# Altium PCB CareLite 1.21.pcbdoc (part 1 of 3)
Units mil, origin at the board's own origin, x right, y up, seen from the top; angles counter-clockwise.
Board outline 3463.4 x 4229.5 mil, 2 copper layers (Top Layer, Bottom Layer); 41 components, 60 nets, 161 pads, 146 vias.
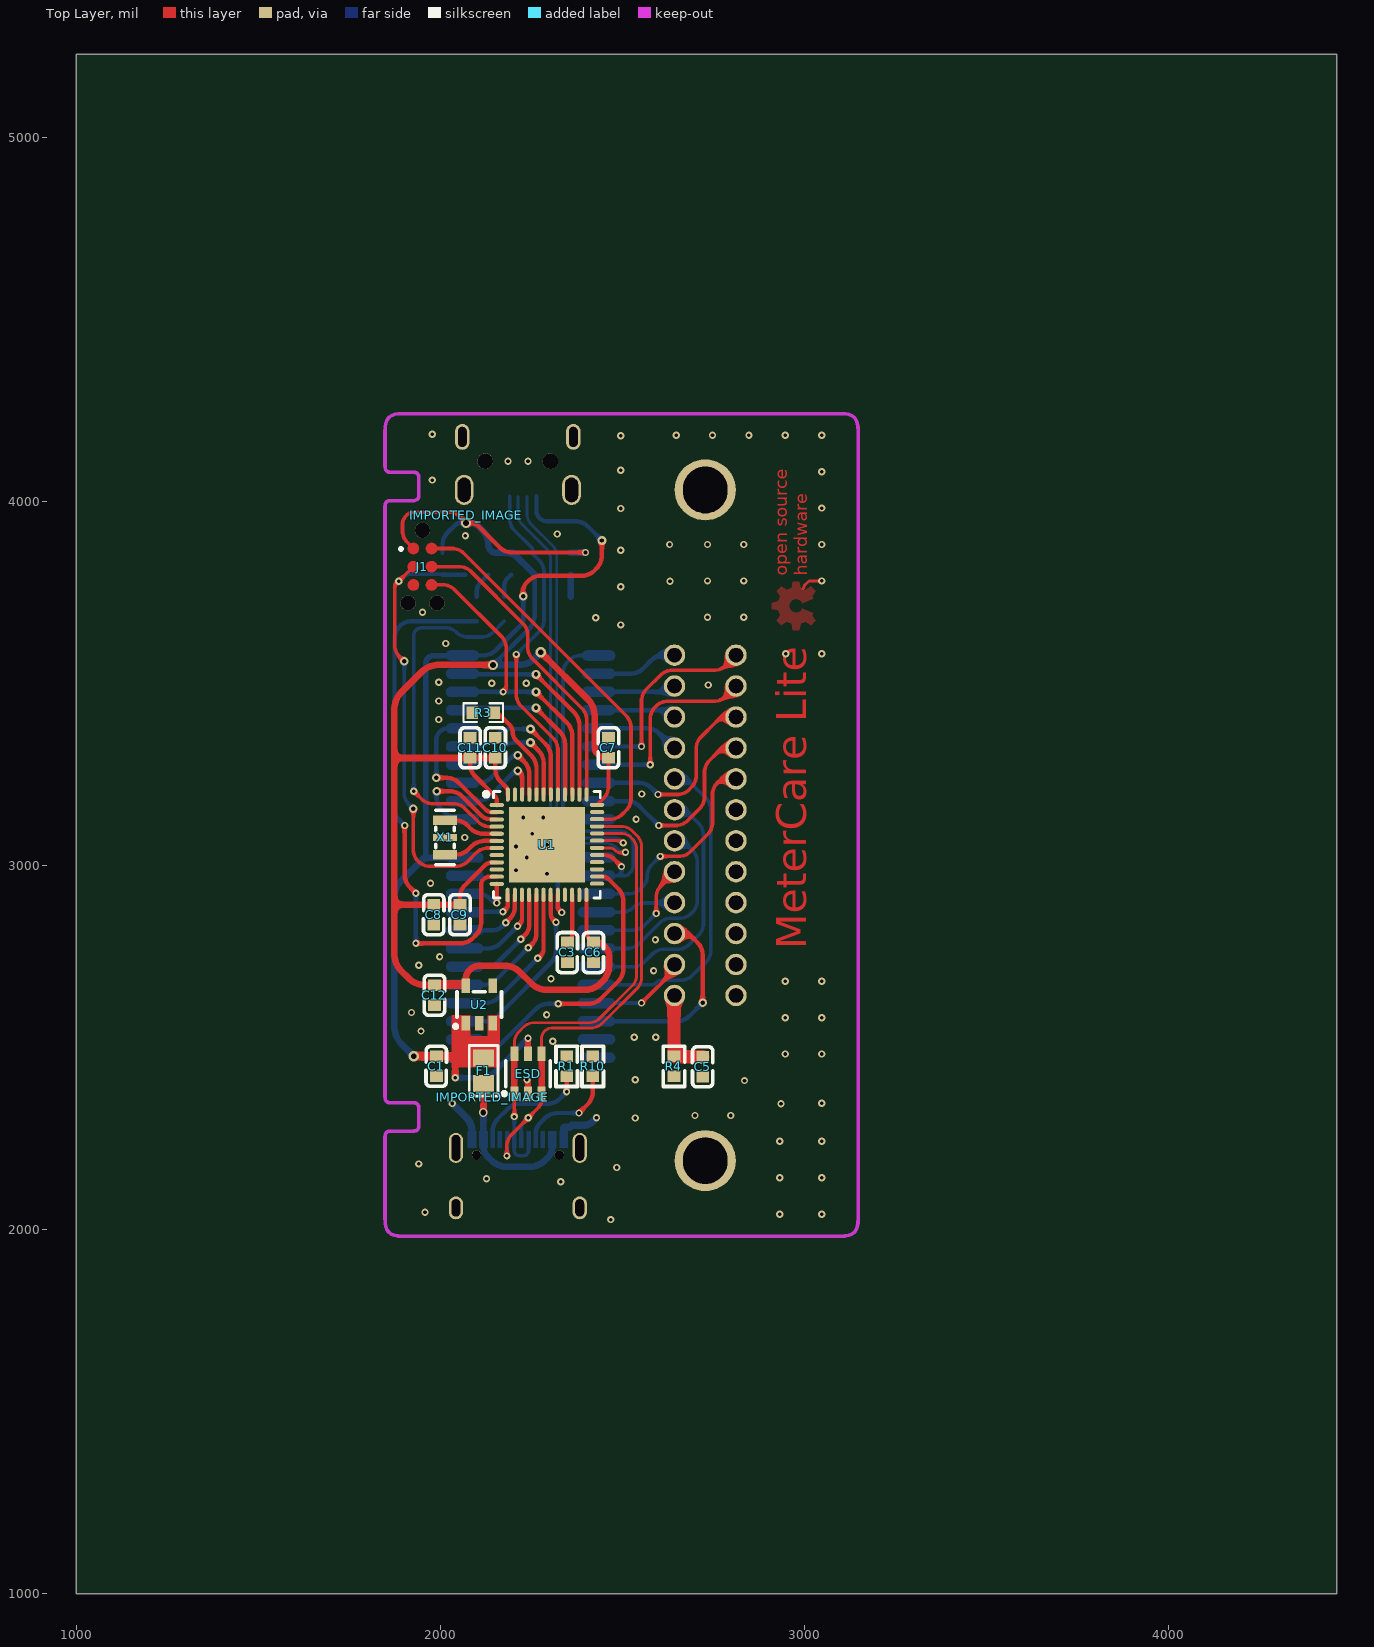
[diagram p0: Top Layer view]
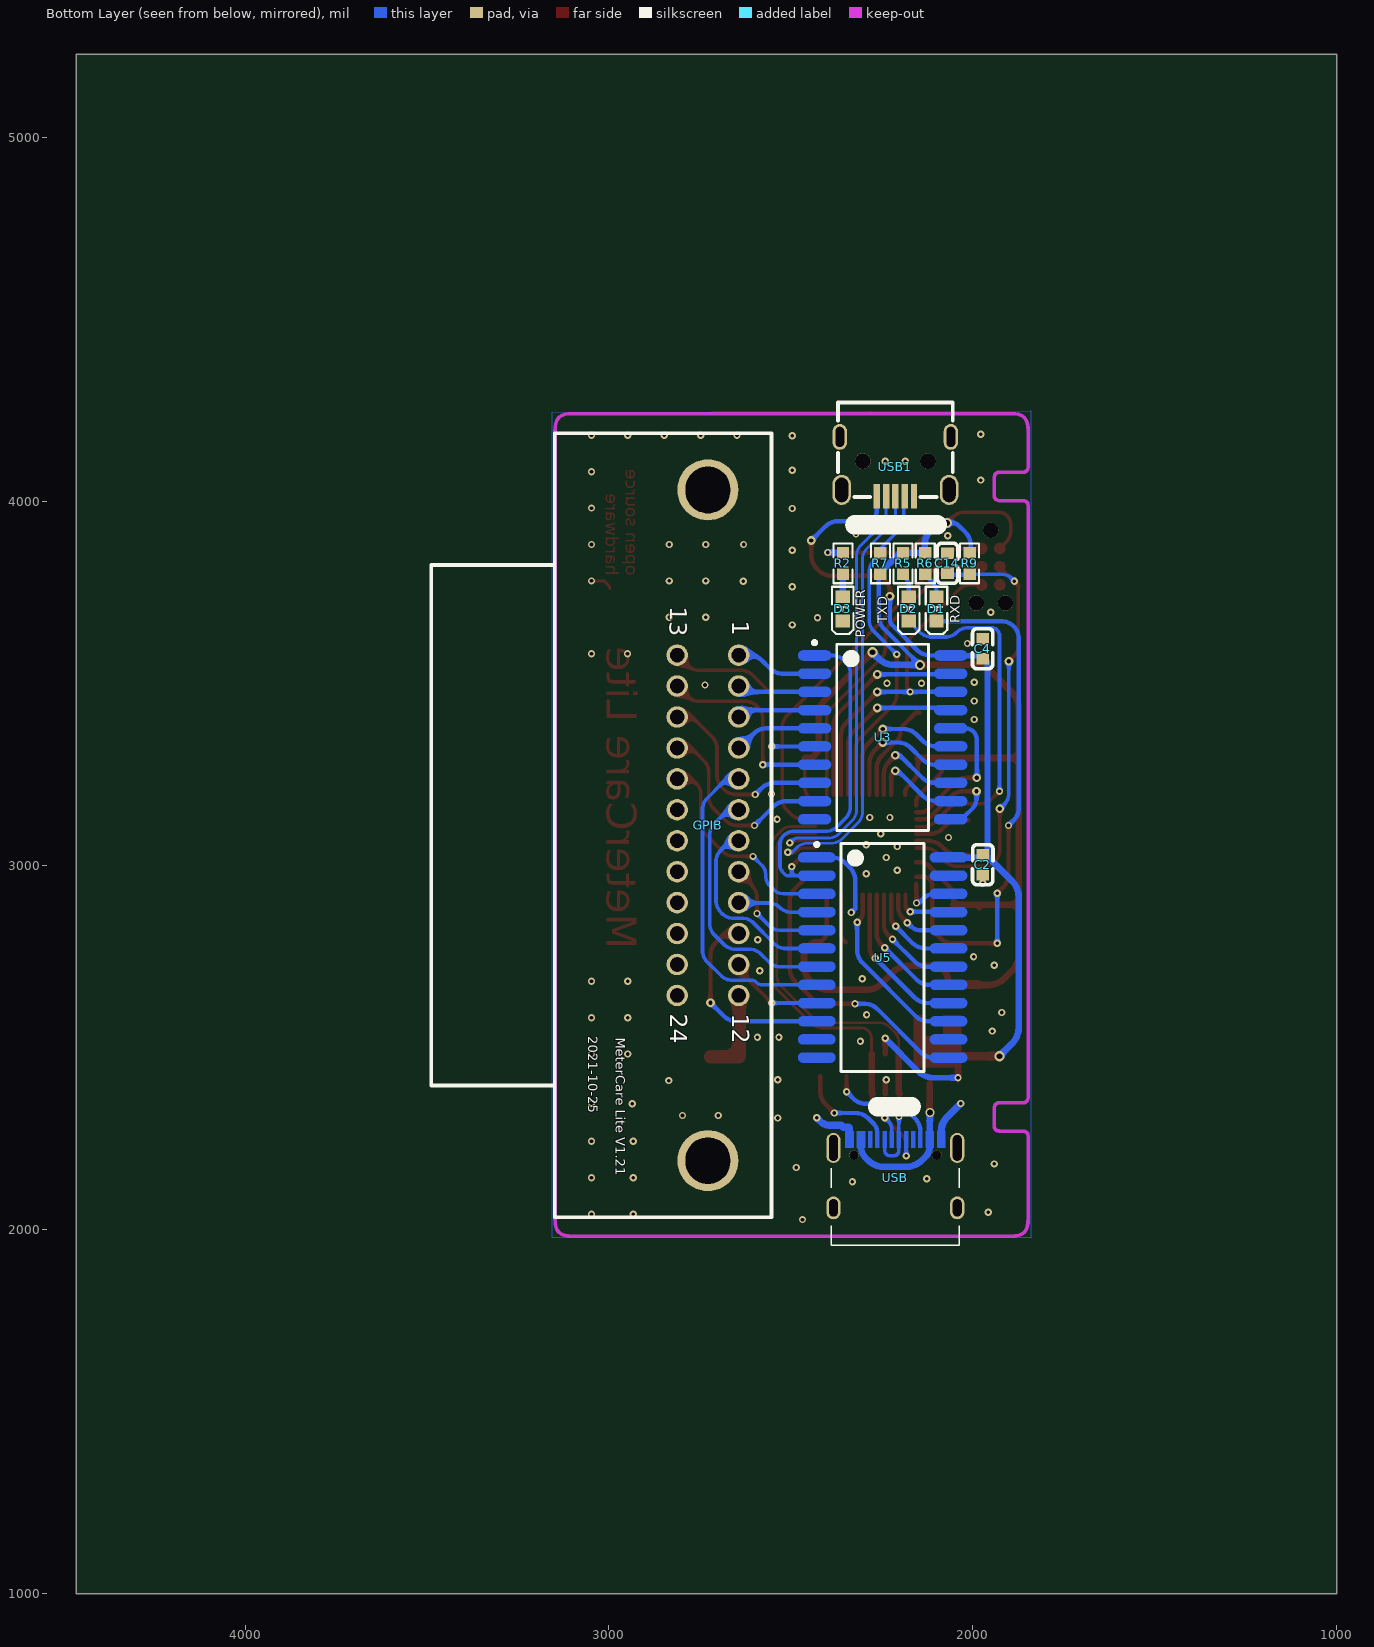
[diagram p1: Bottom Layer view, seen from below]

## Layer stack, top to bottom
Top Layer: signal copper (thickness not stored)
Dielectric: dielectric 12.6, FR-4, Dk 4.8
Bottom Layer: signal copper (thickness not stored)

## Board outline
4463.4,1000 1000,1000 1000,5229.5 4463.4,5229.5

## Components (designator, comment, footprint, x,y, rotation, side; value= is the part's Value field where it differs from the comment)
C1 "10uF" C0603#1 1989.02,2449.15 r90 top
C2 "100nF" C0603#2 1973.02,3002.75 r90 bottom
C3 "4.7uF" C0603#1 2349.02,2761.75 r90 top
C4 "100nF" C0603#2 1973.02,3596.75 r270 bottom
C5 "1nF" C0603#1 2721.02,2447.75 r90 top
C6 "100nF" C0603#1 2420.62,2761.75 r90 top
C7 "100nF" C0603#1 2462.02,3323.75 r270 top
C8 "100nF" C0603#1 1982.02,2865.75 r90 top
C9 "100nF" C0603#1 2054.02,2865.75 r90 top
C10 "100nF" C0603#1 2151.02,3323.75 r270 top
C11 "100nF" C0603#1 2082.02,3323.75 r270 top
C12 "10uF" C0603#1 1984.02,2644.75 r90 top
C14 "100n" C0603#2 2070.02,3830.75 r90 bottom
D1 "LED" LED0603-FD 2100.02,3705.75 r90 bottom
D2 "LED" LED0603-FD 2176.02,3705.75 r90 bottom
D3 "LED" LED0603-FD 2358.02,3705.75 r90 bottom
ESD "SRV05-4-P-T7" SOT-23-6_L2.9-W1.6-P0.95-LS2.8-BL 2241.02,2428.75 r0 top
F1 "0.5A/6V" 0805_L_JX 2119.02,2436.75 r90 top
GPIB "112-024-113R001" "IEEE-488 SOCKET, 24PIN, RIGHT ANGLE, MALE, 112-024-113R001, FUY57109" 3018.02,3102.75 r180 bottom
IMPORTED_IMAGE "IMPORTED_IMAGE" IMPORTED_IMAGE 2071.89,3963.18 r0 top
IMPORTED_IMAGE "IMPORTED_IMAGE" IMPORTED_IMAGE 2143.64,2364.6 r0 top
J1 "8.06.16" 80616-S 1951.02,3921.75 r270 top
R1 "5.1K" R0603#1 2347.45,2448.75 r90 top
R2 "470R" R0603#2 2357.02,3830.75 r90 bottom
R3 "10K" R0603#3 2118.02,3420.75 r180 top
R4 "1M" R0603#1 2642.02,2448.75 r270 top
R5 "470R" R0603#2 2192.02,3830.75 r90 bottom
R6 "470R" R0603#2 2131.02,3830.75 r90 bottom
R7 "4.7K" R0603#2 2254.02,3830.75 r270 bottom
R9 "10K" R0603#2 2009.02,3830.75 r270 bottom
R10 "5.1K" R0603#1 2419.02,2448.75 r90 top
U1 "STM32F411CEU6TR" QFN-48_L7.0-W7.0-P0.50-BL-EP5.1 2293.02,3057.75 r270 top
U2 "LP5907QMFX-3.3Q1" SOT-23-5_L3.0-W1.7-P0.95-LS2.8-BR 2107.03,2618.74 r270 top
U3 "SN75160" SOIC127P1030-20AM 2248.02,3352.75 r0 bottom
U5 "SN75162" SOIC127P1030-24AM 2248.02,2747.75 r0 bottom
USB "USB_C" USB_C_CUSB31-CFM2AX-01-Y 2213.02,2107.75 r0 bottom
USB1 "U-D-M7DS-G-2" MIRCO-USB-SMD_U-D-M7DS-G-2 2213.02,4096.75 r180 bottom
X1 "8MHz" OSC-SMD_3P-L3.2-W1.3-P1.2-L 2013.02,3077.75 r90 top
? "" ? 1722.51,3112.75 r0 top
? "" ? 2498.02,1879.17 r0 top
? "" ? 3529.71,3112.75 r0 top

## Footprints (in the part's own frame and the unit in brackets; to place one, negate y for a bottom-side part, rotate by r counter-clockwise, add the part's x,y. Pads: shape width x height; smd on the part's side, far side on the other; paste and mask are expansions set on the pad)
0805_L_JX [mil]
  rect 45.67x57.87 smd paste+0 mask+4: 1(-35,0) 2(35,0)
  silkscreen extent -69,-39 69,39
80616-S [mil]
  round 42 hole 42 unplated paste+0: ""(0,0) ""(200,-40) ""(200,40)
  Top Layer region: 34.51,-25 34.62,-23.13 34.96,-21.29 35.51,-19.51 36.28,-17.8 37.25,-16.2 38.4,-14.73 39.73,-13.4 41.2,-12.25 42.8,-11.28 44.51,-10.51 46.29,-9.96 48.13,-9.62 50,-9.51 50,-9.51 51.87,-9.62 53.71,-9.96 55.49,-10.51 57.2,-11.28 58.8,-12.25 60.27,-13.4 61.6,-14.73 62.75,-16.2 63.72,-17.8 64.49,-19.51 65.04,-21.29 65.38,-23.13 65.49,-25 65.49,-25 65.38,-26.87 65.04,-28.71 64.49,-30.49 63.72,-32.2 62.75,-33.8 61.6,-35.27 60.27,-36.6 58.8,-37.75 57.2,-38.72 55.49,-39.49 53.71,-40.04 51.87,-40.38 50,-40.49 50,-40.49 48.13,-40.38 46.29,-40.04 44.51,-39.49 42.8,-38.72 41.2,-37.75 39.73,-36.6 38.4,-35.27 37.25,-33.8 36.28,-32.2 35.51,-30.49 34.96,-28.71 34.62,-26.87
  Top Layer region: 34.51,25 34.62,26.87 34.96,28.71 35.51,30.49 36.28,32.2 37.25,33.8 38.4,35.27 39.73,36.6 41.2,37.75 42.8,38.72 44.51,39.49 46.29,40.04 48.13,40.38 50,40.49 50,40.49 51.87,40.38 53.71,40.04 55.49,39.49 57.2,38.72 58.8,37.75 60.27,36.6 61.6,35.27 62.75,33.8 63.72,32.2 64.49,30.49 65.04,28.71 65.38,26.87 65.49,25 65.49,25 65.38,23.13 65.04,21.29 64.49,19.51 63.72,17.8 62.75,16.2 61.6,14.73 60.27,13.4 58.8,12.25 57.2,11.28 55.49,10.51 53.71,9.96 51.87,9.62 50,9.51 50,9.51 48.13,9.62 46.29,9.96 44.51,10.51 42.8,11.28 41.2,12.25 39.73,13.4 38.4,14.73 37.25,16.2 36.28,17.8 35.51,19.51 34.96,21.29 34.62,23.13
  Top Layer region: 84.51,-25 84.62,-23.13 84.96,-21.29 85.51,-19.51 86.28,-17.8 87.25,-16.2 88.4,-14.73 89.73,-13.4 91.2,-12.25 92.8,-11.28 94.51,-10.51 96.29,-9.96 98.13,-9.62 100,-9.51 100,-9.51 101.87,-9.62 103.71,-9.96 105.49,-10.51 107.2,-11.28 108.8,-12.25 110.27,-13.4 111.6,-14.73 112.75,-16.2 113.72,-17.8 114.49,-19.51 115.04,-21.29 115.38,-23.13 115.49,-25 115.49,-25 115.38,-26.87 115.04,-28.71 114.49,-30.49 113.72,-32.2 112.75,-33.8 111.6,-35.27 110.27,-36.6 108.8,-37.75 107.2,-38.72 105.49,-39.49 103.71,-40.04 101.87,-40.38 100,-40.49 100,-40.49 98.13,-40.38 96.29,-40.04 94.51,-39.49 92.8,-38.72 91.2,-37.75 89.73,-36.6 88.4,-35.27 87.25,-33.8 86.28,-32.2 85.51,-30.49 84.96,-28.71 84.62,-26.87
  Top Layer region: 84.51,25 84.62,26.87 84.96,28.71 85.51,30.49 86.28,32.2 87.25,33.8 88.4,35.27 89.73,36.6 91.2,37.75 92.8,38.72 94.51,39.49 96.29,40.04 98.13,40.38 100,40.49 100,40.49 101.87,40.38 103.71,40.04 105.49,39.49 107.2,38.72 108.8,37.75 110.27,36.6 111.6,35.27 112.75,33.8 113.72,32.2 114.49,30.49 115.04,28.71 115.38,26.87 115.49,25 115.49,25 115.38,23.13 115.04,21.29 114.49,19.51 113.72,17.8 112.75,16.2 111.6,14.73 110.27,13.4 108.8,12.25 107.2,11.28 105.49,10.51 103.71,9.96 101.87,9.62 100,9.51 100,9.51 98.13,9.62 96.29,9.96 94.51,10.51 92.8,11.28 91.2,12.25 89.73,13.4 88.4,14.73 87.25,16.2 86.28,17.8 85.51,19.51 84.96,21.29 84.62,23.13
  Top Layer region: 134.51,-25 134.62,-23.13 134.96,-21.29 135.51,-19.51 136.28,-17.8 137.25,-16.2 138.4,-14.73 139.73,-13.4 141.2,-12.25 142.8,-11.28 144.51,-10.51 146.29,-9.96 148.13,-9.62 150,-9.51 150,-9.51 151.87,-9.62 153.71,-9.96 155.49,-10.51 157.2,-11.28 158.8,-12.25 160.27,-13.4 161.6,-14.73 162.75,-16.2 163.72,-17.8 164.49,-19.51 165.04,-21.29 165.38,-23.13 165.49,-25 165.49,-25 165.38,-26.87 165.04,-28.71 164.49,-30.49 163.72,-32.2 162.75,-33.8 161.6,-35.27 160.27,-36.6 158.8,-37.75 157.2,-38.72 155.49,-39.49 153.71,-40.04 151.87,-40.38 150,-40.49 150,-40.49 148.13,-40.38 146.29,-40.04 144.51,-39.49 142.8,-38.72 141.2,-37.75 139.73,-36.6 138.4,-35.27 137.25,-33.8 136.28,-32.2 135.51,-30.49 134.96,-28.71 134.62,-26.87
  Top Layer region: 134.51,25 134.62,26.87 134.96,28.71 135.51,30.49 136.28,32.2 137.25,33.8 138.4,35.27 139.73,36.6 141.2,37.75 142.8,38.72 144.51,39.49 146.29,40.04 148.13,40.38 150,40.49 150,40.49 151.87,40.38 153.71,40.04 155.49,39.49 157.2,38.72 158.8,37.75 160.27,36.6 161.6,35.27 162.75,33.8 163.72,32.2 164.49,30.49 165.04,28.71 165.38,26.87 165.49,25 165.49,25 165.38,23.13 165.04,21.29 164.49,19.51 163.72,17.8 162.75,16.2 161.6,14.73 160.27,13.4 158.8,12.25 157.2,11.28 155.49,10.51 153.71,9.96 151.87,9.62 150,9.51 150,9.51 148.13,9.62 146.29,9.96 144.51,10.51 142.8,11.28 141.2,12.25 139.73,13.4 138.4,14.73 137.25,16.2 136.28,17.8 135.51,19.51 134.96,21.29 134.62,23.13
  silkscreen extent 47,-63 55,-55
C0603#1 [mm]
  rect 0.8x0.9 smd paste+0 mask+0.051: 1(-0.7,0) 2(0.7,0)
  silkscreen extent -1.41,-0.71 1.39,0.72
C0603#2 [mm]
  rect 0.8x0.9 smd paste+0 mask+0.051: 1(0.7,0) 2(-0.7,0)
  silkscreen extent -1.39,-0.72 1.41,0.71
"IEEE-488 SOCKET, 24PIN, RIGHT ANGLE, MALE, 112-024-113R001, FUY57109" [mil]
  round 59 hole 39 slot 39.2 at 90 deg paste+0 mask+4: 1(374.5,476) 2(374.5,391) 3(374.5,306) 4(374.5,221) 5(374.5,136) 6(374.5,51) 7(374.5,-34) 8(374.5,-119) 9(374.5,-204) 10(374.5,-289) 11(374.5,-374) 12(374.5,-459) 13(205.5,476) 14(205.5,391) 15(205.5,306) 16(205.5,221) 17(205.5,136) 18(205.5,51) 19(205.5,-34) 20(205.5,-119) 21(205.5,-204) 22(205.5,-289) 23(205.5,-374) 24(205.5,-459)
  round 168 hole 122.05 slot 128.15 at 90 deg paste+0 mask+4: GUIDE@L(290,930) GUIDE@R(290,-913)
  silkscreen extent -470,-1068 464,1085
IMPORTED_IMAGE [mil]
LED0603-FD [mm]
  rect 0.9x1 smd paste+0 mask+0.051: 1(0.85,0) 2(-0.85,0)
  silkscreen extent -1.75,-0.75 1.55,0.75
MIRCO-USB-SMD_U-D-M7DS-G-2 [mm]
  rect 0.45x1.7 smd paste-100 mask+0.05: 1(-1.3,-2.075) 2(-0.65,-2.075) 3(0,-2.075) 4(0.65,-2.075) 5(1.3,-2.075)
  oval 1.3x2.1 hole 0.9 slot 1.7 at 90 deg paste+0 mask+0.05: 6(3.75,-1.625) 9(-3.75,-1.625)
  oval 1x1.8 hole 0.6 slot 1.4 at 90 deg paste+0 mask+0.05: 7(3.875,2.075) 8(-3.875,2.075)
  round 1.1 hole 1.1 unplated paste+0: ""(-2.275,0.375) ""(2.275,0.375)
  silkscreen extent -4,-2.13 4,4.47
OSC-SMD_3P-L3.2-W1.3-P1.2-L [mm]
  rect 0.65x1.7 smd paste+0 mask+0.051: 1(-1.2,0) 3(1.2,0)
  rect 0.5x1.7 smd paste+0 mask+0.051: 2(0,0)
  silkscreen extent -1.9,-0.65 1.9,0.65
QFN-48_L7.0-W7.0-P0.50-BL-EP5.1 [mm]
  oval 0.28x1 smd paste+0 mask+0.102: 1(-2.769,-3.5) 2(-2.268,-3.5) 3(-1.768,-3.5) 4(-1.268,-3.5) 5(-0.767,-3.5) 6(-0.267,-3.5) 7(0.231,-3.5) 8(0.731,-3.5) 9(1.232,-3.5) 10(1.732,-3.5) 11(2.233,-3.5) 12(2.733,-3.5) 25(2.718,3.5) 26(2.217,3.5) 27(1.717,3.5) 28(1.217,3.5) 29(0.716,3.5) 30(0.216,3.5) 31(-0.282,3.5) 32(-0.782,3.5) 33(-1.283,3.5) 34(-1.783,3.5) 35(-2.284,3.5) 36(-2.784,3.5)
  oval 1x0.28 smd paste+0 mask+0.102: 13(3.5,-2.743) 14(3.5,-2.243) 15(3.5,-1.742) 16(3.5,-1.242) 17(3.5,-0.742) 18(3.5,-0.241) 19(3.5,0.257) 20(3.5,0.757) 21(3.5,1.257) 22(3.5,1.758) 23(3.5,2.258) 24(3.5,2.759) 37(-3.5,2.769) 38(-3.5,2.268) 39(-3.5,1.768) 40(-3.5,1.268) 41(-3.5,0.767) 42(-3.5,0.267) 43(-3.5,-0.231) 44(-3.5,-0.731) 45(-3.5,-1.232) 46(-3.5,-1.732) 47(-3.5,-2.233) 48(-3.5,-2.733)
  rect 5.3x5.3 smd paste+0 mask+0.102: 49(0,0)
  silkscreen extent -3.73,-4.4 3.72,3.73
R0603#1 [mm]
  rect 0.8x0.9 smd paste+0 mask+0.102: 1(-0.7,0) 2(0.7,0)
  silkscreen extent -1.4,-0.75 1.4,0.76
R0603#2 [mm]
  rect 0.806x0.864 smd paste-100 mask+0.051: 1(0.753,0) 2(-0.753,0)
  silkscreen extent -1.39,-0.66 1.39,0.66
R0603#3 [mm]
  rect 0.806x0.864 smd paste-100 mask+0.051: 1(-0.753,0) 2(0.753,0)
  silkscreen extent -1.39,-0.66 1.39,0.66
SOIC127P1030-20AM [mil]
  Top Layer region: 155.51,-238.78 154.53,-238.74 153.55,-238.64 152.58,-238.46 151.63,-238.22 150.7,-237.91 149.79,-237.53 148.91,-237.09 148.06,-236.59 147.25,-236.03 146.49,-235.41 145.77,-234.74 145.1,-234.02 144.48,-233.26 143.92,-232.45 143.42,-231.6 142.98,-230.72 142.6,-229.82 142.29,-228.88 142.05,-227.93 141.87,-226.96 141.77,-225.98 141.73,-225 141.77,-224.02 141.87,-223.04 142.05,-222.07 142.29,-221.12 142.6,-220.18 142.98,-219.28 143.42,-218.4 143.92,-217.55 144.48,-216.74 145.1,-215.98 145.77,-215.26 146.49,-214.59 147.25,-213.97 148.06,-213.41 148.91,-212.91 149.79,-212.47 150.7,-212.09 151.63,-211.78 152.58,-211.53 153.55,-211.36 154.53,-211.26 155.51,-211.22 218.5,-211.22 219.49,-211.26 220.47,-211.36 221.43,-211.53 222.39,-211.78 223.32,-212.09 224.23,-212.47 225.11,-212.91 225.95,-213.41 226.76,-213.97 227.53,-214.59 228.25,-215.26 228.92,-215.98 229.53,-216.74 230.1,-217.55 230.6,-218.4 231.04,-219.28 231.41,-220.18 231.72,-221.12 231.97,-222.07 232.14,-223.04 232.25,-224.02 232.28,-225 232.25,-225.98 232.14,-226.96 231.97,-227.93 231.72,-228.88 231.41,-229.82 231.04,-230.72 230.6,-231.6 230.1,-232.45 229.53,-233.26 228.92,-234.02 228.25,-234.74 227.53,-235.41 226.76,-236.03 225.95,-236.59 225.11,-237.09 224.23,-237.53 223.32,-237.91 222.39,-238.22 221.43,-238.46 220.47,-238.64 219.49,-238.74 218.5,-238.78
  Top Layer region: 155.51,-188.78 154.53,-188.74 153.55,-188.64 152.58,-188.46 151.63,-188.22 150.7,-187.91 149.79,-187.53 148.91,-187.09 148.06,-186.59 147.25,-186.03 146.49,-185.41 145.77,-184.74 145.1,-184.02 144.48,-183.26 143.92,-182.45 143.42,-181.6 142.98,-180.72 142.6,-179.82 142.29,-178.88 142.05,-177.93 141.87,-176.96 141.77,-175.98 141.73,-175 141.77,-174.02 141.87,-173.04 142.05,-172.07 142.29,-171.12 142.6,-170.18 142.98,-169.28 143.42,-168.4 143.92,-167.55 144.48,-166.74 145.1,-165.98 145.77,-165.26 146.49,-164.59 147.25,-163.97 148.06,-163.41 148.91,-162.91 149.79,-162.47 150.7,-162.09 151.63,-161.78 152.58,-161.53 153.55,-161.36 154.53,-161.26 155.51,-161.22 218.5,-161.22 219.49,-161.26 220.47,-161.36 221.43,-161.53 222.39,-161.78 223.32,-162.09 224.23,-162.47 225.11,-162.91 225.95,-163.41 226.76,-163.97 227.53,-164.59 228.25,-165.26 228.92,-165.98 229.53,-166.74 230.1,-167.55 230.6,-168.4 231.04,-169.28 231.41,-170.18 231.72,-171.12 231.97,-172.07 232.14,-173.04 232.25,-174.02 232.28,-175 232.25,-175.98 232.14,-176.96 231.97,-177.93 231.72,-178.88 231.41,-179.82 231.04,-180.72 230.6,-181.6 230.1,-182.45 229.53,-183.26 228.92,-184.02 228.25,-184.74 227.53,-185.41 226.76,-186.03 225.95,-186.59 225.11,-187.09 224.23,-187.53 223.32,-187.91 222.39,-188.22 221.43,-188.46 220.47,-188.64 219.49,-188.74 218.5,-188.78
  Top Layer region: 155.51,-138.78 154.53,-138.74 153.55,-138.64 152.58,-138.46 151.63,-138.22 150.7,-137.91 149.79,-137.53 148.91,-137.09 148.06,-136.59 147.25,-136.03 146.49,-135.41 145.77,-134.74 145.1,-134.02 144.48,-133.26 143.92,-132.45 143.42,-131.6 142.98,-130.72 142.6,-129.82 142.29,-128.88 142.05,-127.93 141.87,-126.96 141.77,-125.98 141.73,-125 141.77,-124.02 141.87,-123.04 142.05,-122.07 142.29,-121.12 142.6,-120.18 142.98,-119.28 143.42,-118.4 143.92,-117.55 144.48,-116.74 145.1,-115.98 145.77,-115.26 146.49,-114.59 147.25,-113.97 148.06,-113.41 148.91,-112.91 149.79,-112.47 150.7,-112.09 151.63,-111.78 152.58,-111.53 153.55,-111.36 154.53,-111.26 155.51,-111.22 218.5,-111.22 219.49,-111.26 220.47,-111.36 221.43,-111.53 222.39,-111.78 223.32,-112.09 224.23,-112.47 225.11,-112.91 225.95,-113.41 226.76,-113.97 227.53,-114.59 228.25,-115.26 228.92,-115.98 229.53,-116.74 230.1,-117.55 230.6,-118.4 231.04,-119.28 231.41,-120.18 231.72,-121.12 231.97,-122.07 232.14,-123.04 232.25,-124.02 232.28,-125 232.25,-125.98 232.14,-126.96 231.97,-127.93 231.72,-128.88 231.41,-129.82 231.04,-130.72 230.6,-131.6 230.1,-132.45 229.53,-133.26 228.92,-134.02 228.25,-134.74 227.53,-135.41 226.76,-136.03 225.95,-136.59 225.11,-137.09 224.23,-137.53 223.32,-137.91 222.39,-138.22 221.43,-138.46 220.47,-138.64 219.49,-138.74 218.5,-138.78
  Top Layer region: 155.51,-88.78 154.53,-88.74 153.55,-88.64 152.58,-88.46 151.63,-88.22 150.7,-87.91 149.79,-87.53 148.91,-87.09 148.06,-86.59 147.25,-86.03 146.49,-85.41 145.77,-84.74 145.1,-84.02 144.48,-83.26 143.92,-82.45 143.42,-81.6 142.98,-80.72 142.6,-79.82 142.29,-78.88 142.05,-77.93 141.87,-76.96 141.77,-75.98 141.73,-75 141.77,-74.02 141.87,-73.04 142.05,-72.07 142.29,-71.12 142.6,-70.18 142.98,-69.28 143.42,-68.4 143.92,-67.55 144.48,-66.74 145.1,-65.98 145.77,-65.26 146.49,-64.59 147.25,-63.97 148.06,-63.41 148.91,-62.91 149.79,-62.47 150.7,-62.09 151.63,-61.78 152.58,-61.53 153.55,-61.36 154.53,-61.26 155.51,-61.22 218.5,-61.22 219.49,-61.26 220.47,-61.36 221.43,-61.53 222.39,-61.78 223.32,-62.09 224.23,-62.47 225.11,-62.91 225.95,-63.41 226.76,-63.97 227.53,-64.59 228.25,-65.26 228.92,-65.98 229.53,-66.74 230.1,-67.55 230.6,-68.4 231.04,-69.28 231.41,-70.18 231.72,-71.12 231.97,-72.07 232.14,-73.04 232.25,-74.02 232.28,-75 232.25,-75.98 232.14,-76.96 231.97,-77.93 231.72,-78.88 231.41,-79.82 231.04,-80.72 230.6,-81.6 230.1,-82.45 229.53,-83.26 228.92,-84.02 228.25,-84.74 227.53,-85.41 226.76,-86.03 225.95,-86.59 225.11,-87.09 224.23,-87.53 223.32,-87.91 222.39,-88.22 221.43,-88.46 220.47,-88.64 219.49,-88.74 218.5,-88.78
  Top Layer region: 155.51,-38.78 154.53,-38.74 153.55,-38.64 152.58,-38.46 151.63,-38.22 150.7,-37.91 149.79,-37.53 148.91,-37.09 148.06,-36.59 147.25,-36.03 146.49,-35.41 145.77,-34.74 145.1,-34.02 144.48,-33.26 143.92,-32.45 143.42,-31.6 142.98,-30.72 142.6,-29.82 142.29,-28.88 142.05,-27.93 141.87,-26.96 141.77,-25.98 141.73,-25 141.77,-24.02 141.87,-23.04 142.05,-22.07 142.29,-21.12 142.6,-20.18 142.98,-19.28 143.42,-18.4 143.92,-17.55 144.48,-16.74 145.1,-15.98 145.77,-15.26 146.49,-14.59 147.25,-13.97 148.06,-13.41 148.91,-12.91 149.79,-12.47 150.7,-12.09 151.63,-11.78 152.58,-11.53 153.55,-11.36 154.53,-11.26 155.51,-11.22 218.5,-11.22 219.49,-11.26 220.47,-11.36 221.43,-11.53 222.39,-11.78 223.32,-12.09 224.23,-12.47 225.11,-12.91 225.95,-13.41 226.76,-13.97 227.53,-14.59 228.25,-15.26 228.92,-15.98 229.53,-16.74 230.1,-17.55 230.6,-18.4 231.04,-19.28 231.41,-20.18 231.72,-21.12 231.97,-22.07 232.14,-23.04 232.25,-24.02 232.28,-25 232.25,-25.98 232.14,-26.96 231.97,-27.93 231.72,-28.88 231.41,-29.82 231.04,-30.72 230.6,-31.6 230.1,-32.45 229.53,-33.26 228.92,-34.02 228.25,-34.74 227.53,-35.41 226.76,-36.03 225.95,-36.59 225.11,-37.09 224.23,-37.53 223.32,-37.91 222.39,-38.22 221.43,-38.46 220.47,-38.64 219.49,-38.74 218.5,-38.78
  Top Layer region: 155.51,11.22 154.53,11.26 153.55,11.36 152.58,11.54 151.63,11.78 150.7,12.09 149.79,12.47 148.91,12.91 148.06,13.41 147.25,13.97 146.49,14.59 145.77,15.26 145.1,15.98 144.48,16.74 143.92,17.55 143.42,18.4 142.98,19.28 142.6,20.18 142.29,21.12 142.05,22.07 141.87,23.04 141.77,24.02 141.73,25 141.77,25.98 141.87,26.96 142.05,27.93 142.29,28.88 142.6,29.82 142.98,30.72 143.42,31.6 143.92,32.45 144.48,33.26 145.1,34.02 145.77,34.74 146.49,35.41 147.25,36.03 148.06,36.59 148.91,37.09 149.79,37.53 150.7,37.91 151.63,38.22 152.58,38.47 153.55,38.64 154.53,38.74 155.51,38.78 218.5,38.78 219.49,38.74 220.47,38.64 221.43,38.47 222.39,38.22 223.32,37.91 224.23,37.53 225.11,37.09 225.95,36.59 226.76,36.03 227.53,35.41 228.25,34.74 228.92,34.02 229.53,33.26 230.1,32.45 230.6,31.6 231.04,30.72 231.41,29.82 231.72,28.88 231.97,27.93 232.14,26.96 232.25,25.98 232.28,25 232.25,24.02 232.14,23.04 231.97,22.07 231.72,21.12 231.41,20.18 231.04,19.28 230.6,18.4 230.1,17.55 229.53,16.74 228.92,15.98 228.25,15.26 227.53,14.59 226.76,13.97 225.95,13.41 225.11,12.91 224.23,12.47 223.32,12.09 222.39,11.78 221.43,11.54 220.47,11.36 219.49,11.26 218.5,11.22
  Top Layer region: 155.51,61.22 154.53,61.26 153.55,61.36 152.58,61.54 151.63,61.78 150.7,62.09 149.79,62.47 148.91,62.91 148.06,63.41 147.25,63.97 146.49,64.59 145.77,65.26 145.1,65.98 144.48,66.74 143.92,67.55 143.42,68.4 142.98,69.28 142.6,70.18 142.29,71.12 142.05,72.07 141.87,73.04 141.77,74.02 141.73,75 141.77,75.98 141.87,76.96 142.05,77.93 142.29,78.88 142.6,79.82 142.98,80.72 143.42,81.6 143.92,82.45 144.48,83.26 145.1,84.02 145.77,84.74 146.49,85.41 147.25,86.03 148.06,86.59 148.91,87.09 149.79,87.53 150.7,87.91 151.63,88.22 152.58,88.47 153.55,88.64 154.53,88.74 155.51,88.78 218.5,88.78 219.49,88.74 220.47,88.64 221.43,88.47 222.39,88.22 223.32,87.91 224.23,87.53 225.11,87.09 225.95,86.59 226.76,86.03 227.53,85.41 228.25,84.74 228.92,84.02 229.53,83.26 230.1,82.45 230.6,81.6 231.04,80.72 231.41,79.82 231.72,78.88 231.97,77.93 232.14,76.96 232.25,75.98 232.28,75 232.25,74.02 232.14,73.04 231.97,72.07 231.72,71.12 231.41,70.18 231.04,69.28 230.6,68.4 230.1,67.55 229.53,66.74 228.92,65.98 228.25,65.26 227.53,64.59 226.76,63.97 225.95,63.41 225.11,62.91 224.23,62.47 223.32,62.09 222.39,61.78 221.43,61.54 220.47,61.36 219.49,61.26 218.5,61.22
  Top Layer region: 155.51,111.22 154.53,111.26 153.55,111.36 152.58,111.54 151.63,111.78 150.7,112.09 149.79,112.47 148.91,112.91 148.06,113.41 147.25,113.97 146.49,114.59 145.77,115.26 145.1,115.98 144.48,116.74 143.92,117.55 143.42,118.4 142.98,119.28 142.6,120.18 142.29,121.12 142.05,122.07 141.87,123.04 141.77,124.02 141.73,125 141.77,125.98 141.87,126.96 142.05,127.93 142.29,128.88 142.6,129.82 142.98,130.72 143.42,131.6 143.92,132.45 144.48,133.26 145.1,134.02 145.77,134.74 146.49,135.41 147.25,136.03 148.06,136.59 148.91,137.09 149.79,137.53 150.7,137.91 151.63,138.22 152.58,138.47 153.55,138.64 154.53,138.74 155.51,138.78 218.5,138.78 219.49,138.74 220.47,138.64 221.43,138.47 222.39,138.22 223.32,137.91 224.23,137.53 225.11,137.09 225.95,136.59 226.76,136.03 227.53,135.41 228.25,134.74 228.92,134.02 229.53,133.26 230.1,132.45 230.6,131.6 231.04,130.72 231.41,129.82 231.72,128.88 231.97,127.93 232.14,126.96 232.25,125.98 232.28,125 232.25,124.02 232.14,123.04 231.97,122.07 231.72,121.12 231.41,120.18 231.04,119.28 230.6,118.4 230.1,117.55 229.53,116.74 228.92,115.98 228.25,115.26 227.53,114.59 226.76,113.97 225.95,113.41 225.11,112.91 224.23,112.47 223.32,112.09 222.39,111.78 221.43,111.54 220.47,111.36 219.49,111.26 218.5,111.22
  Top Layer region: 155.51,161.22 154.53,161.26 153.55,161.36 152.58,161.54 151.63,161.78 150.7,162.09 149.79,162.47 148.91,162.91 148.06,163.41 147.25,163.97 146.49,164.59 145.77,165.26 145.1,165.98 144.48,166.74 143.92,167.55 143.42,168.4 142.98,169.28 142.6,170.18 142.29,171.12 142.05,172.07 141.87,173.04 141.77,174.02 141.73,175 141.77,175.98 141.87,176.96 142.05,177.93 142.29,178.88 142.6,179.82 142.98,180.72 143.42,181.6 143.92,182.45 144.48,183.26 145.1,184.02 145.77,184.74 146.49,185.41 147.25,186.03 148.06,186.59 148.91,187.09 149.79,187.53 150.7,187.91 151.63,188.22 152.58,188.47 153.55,188.64 154.53,188.74 155.51,188.78 218.5,188.78 219.49,188.74 220.47,188.64 221.43,188.47 222.39,188.22 223.32,187.91 224.23,187.53 225.11,187.09 225.95,186.59 226.76,186.03 227.53,185.41 228.25,184.74 228.92,184.02 229.53,183.26 230.1,182.45 230.6,181.6 231.04,180.72 231.41,179.82 231.72,178.88 231.97,177.93 232.14,176.96 232.25,175.98 232.28,175 232.25,174.02 232.14,173.04 231.97,172.07 231.72,171.12 231.41,170.18 231.04,169.28 230.6,168.4 230.1,167.55 229.53,166.74 228.92,165.98 228.25,165.26 227.53,164.59 226.76,163.97 225.95,163.41 225.11,162.91 224.23,162.47 223.32,162.09 222.39,161.78 221.43,161.54 220.47,161.36 219.49,161.26 218.5,161.22
  Top Layer region: 155.51,211.22 154.53,211.26 153.55,211.36 152.58,211.54 151.63,211.78 150.7,212.09 149.79,212.47 148.91,212.91 148.06,213.41 147.25,213.97 146.49,214.59 145.77,215.26 145.1,215.98 144.48,216.74 143.92,217.55 143.42,218.4 142.98,219.28 142.6,220.18 142.29,221.12 142.05,222.07 141.87,223.04 141.77,224.02 141.73,225 141.77,225.98 141.87,226.96 142.05,227.93 142.29,228.88 142.6,229.82 142.98,230.72 143.42,231.6 143.92,232.45 144.48,233.26 145.1,234.02 145.77,234.74 146.49,235.41 147.25,236.03 148.06,236.59 148.91,237.09 149.79,237.53 150.7,237.91 151.63,238.22 152.58,238.47 153.55,238.64 154.53,238.74 155.51,238.78 218.5,238.78 219.49,238.74 220.47,238.64 221.43,238.47 222.39,238.22 223.32,237.91 224.23,237.53 225.11,237.09 225.95,236.59 226.76,236.03 227.53,235.41 228.25,234.74 228.92,234.02 229.53,233.26 230.1,232.45 230.6,231.6 231.04,230.72 231.41,229.82 231.72,228.88 231.97,227.93 232.14,226.96 232.25,225.98 232.28,225 232.25,224.02 232.14,223.04 231.97,222.07 231.72,221.12 231.41,220.18 231.04,219.28 230.6,218.4 230.1,217.55 229.53,216.74 228.92,215.98 228.25,215.26 227.53,214.59 226.76,213.97 225.95,213.41 225.11,212.91 224.23,212.47 223.32,212.09 222.39,211.78 221.43,211.54 220.47,211.36 219.49,211.26 218.5,211.22
  Top Layer region: -218.5,-238.78 -219.49,-238.74 -220.46,-238.64 -221.43,-238.46 -222.39,-238.22 -223.32,-237.91 -224.23,-237.53 -225.11,-237.09 -225.95,-236.59 -226.76,-236.03 -227.53,-235.41 -228.25,-234.74 -228.92,-234.02 -229.54,-233.26 -230.1,-232.45 -230.6,-231.6 -231.04,-230.72 -231.41,-229.82 -231.72,-228.88 -231.97,-227.93 -232.14,-226.96 -232.25,-225.98 -232.28,-225 -232.25,-224.02 -232.14,-223.04 -231.97,-222.07 -231.72,-221.12 -231.41,-220.18 -231.04,-219.28 -230.6,-218.4 -230.1,-217.55 -229.54,-216.74 -228.92,-215.98 -228.25,-215.26 -227.53,-214.59 -226.76,-213.97 -225.95,-213.41 -225.11,-212.91 -224.23,-212.47 -223.32,-212.09 -222.39,-211.78 -221.43,-211.53 -220.46,-211.36 -219.49,-211.26 -218.5,-211.22 -155.51,-211.22 -154.53,-211.26 -153.55,-211.36 -152.58,-211.53 -151.63,-211.78 -150.7,-212.09 -149.79,-212.47 -148.91,-212.91 -148.06,-213.41 -147.25,-213.97 -146.49,-214.59 -145.77,-215.26 -145.1,-215.98 -144.48,-216.74 -143.92,-217.55 -143.42,-218.4 -142.98,-219.28 -142.6,-220.18 -142.29,-221.12 -142.05,-222.07 -141.87,-223.04 -141.77,-224.02 -141.73,-225 -141.77,-225.98 -141.87,-226.96 -142.05,-227.93 -142.29,-228.88 -142.6,-229.82 -142.98,-230.72 -143.42,-231.6 -143.92,-232.45 -144.48,-233.26 -145.1,-234.02 -145.77,-234.74 -146.49,-235.41 -147.25,-236.03 -148.06,-236.59 -148.91,-237.09 -149.79,-237.53 -150.7,-237.91 -151.63,-238.22 -152.58,-238.46 -153.55,-238.64 -154.53,-238.74 -155.51,-238.78
  Top Layer region: -218.5,-188.78 -219.49,-188.74 -220.46,-188.64 -221.43,-188.46 -222.39,-188.22 -223.32,-187.91 -224.23,-187.53 -225.11,-187.09 -225.95,-186.59 -226.76,-186.03 -227.53,-185.41 -228.25,-184.74 -228.92,-184.02 -229.54,-183.26 -230.1,-182.45 -230.6,-181.6 -231.04,-180.72 -231.41,-179.82 -231.72,-178.88 -231.97,-177.93 -232.14,-176.96 -232.25,-175.98 -232.28,-175 -232.25,-174.02 -232.14,-173.04 -231.97,-172.07 -231.72,-171.12 -231.41,-170.18 -231.04,-169.28 -230.6,-168.4 -230.1,-167.55 -229.54,-166.74 -228.92,-165.98 -228.25,-165.26 -227.53,-164.59 -226.76,-163.97 -225.95,-163.41 -225.11,-162.91 -224.23,-162.47 -223.32,-162.09 -222.39,-161.78 -221.43,-161.53 -220.46,-161.36 -219.49,-161.26 -218.5,-161.22 -155.51,-161.22 -154.53,-161.26 -153.55,-161.36 -152.58,-161.53 -151.63,-161.78 -150.7,-162.09 -149.79,-162.47 -148.91,-162.91 -148.06,-163.41 -147.25,-163.97 -146.49,-164.59 -145.77,-165.26 -145.1,-165.98 -144.48,-166.74 -143.92,-167.55 -143.42,-168.4 -142.98,-169.28 -142.6,-170.18 -142.29,-171.12 -142.05,-172.07 -141.87,-173.04 -141.77,-174.02 -141.73,-175 -141.77,-175.98 -141.87,-176.96 -142.05,-177.93 -142.29,-178.88 -142.6,-179.82 -142.98,-180.72 -143.42,-181.6 -143.92,-182.45 -144.48,-183.26 -145.1,-184.02 -145.77,-184.74 -146.49,-185.41 -147.25,-186.03 -148.06,-186.59 -148.91,-187.09 -149.79,-187.53 -150.7,-187.91 -151.63,-188.22 -152.58,-188.46 -153.55,-188.64 -154.53,-188.74 -155.51,-188.78
  Top Layer region: -218.5,-138.78 -219.49,-138.74 -220.46,-138.64 -221.43,-138.46 -222.39,-138.22 -223.32,-137.91 -224.23,-137.53 -225.11,-137.09 -225.95,-136.59 -226.76,-136.03 -227.53,-135.41 -228.25,-134.74 -228.92,-134.02 -229.54,-133.26 -230.1,-132.45 -230.6,-131.6 -231.04,-130.72 -231.41,-129.82 -231.72,-128.88 -231.97,-127.93 -232.14,-126.96 -232.25,-125.98 -232.28,-125 -232.25,-124.02 -232.14,-123.04 -231.97,-122.07 -231.72,-121.12 -231.41,-120.18 -231.04,-119.28 -230.6,-118.4 -230.1,-117.55 -229.54,-116.74 -228.92,-115.98 -228.25,-115.26 -227.53,-114.59 -226.76,-113.97 -225.95,-113.41 -225.11,-112.91 -224.23,-112.47 -223.32,-112.09 -222.39,-111.78 -221.43,-111.53 -220.46,-111.36 -219.49,-111.26 -218.5,-111.22 -155.51,-111.22 -154.53,-111.26 -153.55,-111.36 -152.58,-111.53 -151.63,-111.78 -150.7,-112.09 -149.79,-112.47 -148.91,-112.91 -148.06,-113.41 -147.25,-113.97 -146.49,-114.59 -145.77,-115.26 -145.1,-115.98 -144.48,-116.74 -143.92,-117.55 -143.42,-118.4 -142.98,-119.28 -142.6,-120.18 -142.29,-121.12 -142.05,-122.07 -141.87,-123.04 -141.77,-124.02 -141.73,-125 -141.77,-125.98 -141.87,-126.96 -142.05,-127.93 -142.29,-128.88 -142.6,-129.82 -142.98,-130.72 -143.42,-131.6 -143.92,-132.45 -144.48,-133.26 -145.1,-134.02 -145.77,-134.74 -146.49,-135.41 -147.25,-136.03 -148.06,-136.59 -148.91,-137.09 -149.79,-137.53 -150.7,-137.91 -151.63,-138.22 -152.58,-138.46 -153.55,-138.64 -154.53,-138.74 -155.51,-138.78
  Top Layer region: -218.5,-88.78 -219.49,-88.74 -220.46,-88.64 -221.43,-88.46 -222.39,-88.22 -223.32,-87.91 -224.23,-87.53 -225.11,-87.09 -225.95,-86.59 -226.76,-86.03 -227.53,-85.41 -228.25,-84.74 -228.92,-84.02 -229.54,-83.26 -230.1,-82.45 -230.6,-81.6 -231.04,-80.72 -231.41,-79.82 -231.72,-78.88 -231.97,-77.93 -232.14,-76.96 -232.25,-75.98 -232.28,-75 -232.25,-74.02 -232.14,-73.04 -231.97,-72.07 -231.72,-71.12 -231.41,-70.18 -231.04,-69.28 -230.6,-68.4 -230.1,-67.55 -229.54,-66.74 -228.92,-65.98 -228.25,-65.26 -227.53,-64.59 -226.76,-63.97 -225.95,-63.41 -225.11,-62.91 -224.23,-62.47 -223.32,-62.09 -222.39,-61.78 -221.43,-61.53 -220.46,-61.36 -219.49,-61.26 -218.5,-61.22 -155.51,-61.22 -154.53,-61.26 -153.55,-61.36 -152.58,-61.53 -151.63,-61.78 -150.7,-62.09 -149.79,-62.47 -148.91,-62.91 -148.06,-63.41 -147.25,-63.97 -146.49,-64.59 -145.77,-65.26 -145.1,-65.98 -144.48,-66.74 -143.92,-67.55 -143.42,-68.4 -142.98,-69.28 -142.6,-70.18 -142.29,-71.12 -142.05,-72.07 -141.87,-73.04 -141.77,-74.02 -141.73,-75 -141.77,-75.98 -141.87,-76.96 -142.05,-77.93 -142.29,-78.88 -142.6,-79.82 -142.98,-80.72 -143.42,-81.6 -143.92,-82.45 -144.48,-83.26 -145.1,-84.02 -145.77,-84.74 -146.49,-85.41 -147.25,-86.03 -148.06,-86.59 -148.91,-87.09 -149.79,-87.53 -150.7,-87.91 -151.63,-88.22 -152.58,-88.46 -153.55,-88.64 -154.53,-88.74 -155.51,-88.78
  Top Layer region: -218.5,-38.78 -219.49,-38.74 -220.46,-38.64 -221.43,-38.46 -222.39,-38.22 -223.32,-37.91 -224.23,-37.53 -225.11,-37.09 -225.95,-36.59 -226.76,-36.03 -227.53,-35.41 -228.25,-34.74 -228.92,-34.02 -229.54,-33.26 -230.1,-32.45 -230.6,-31.6 -231.04,-30.72 -231.41,-29.82 -231.72,-28.88 -231.97,-27.93 -232.14,-26.96 -232.25,-25.98 -232.28,-25 -232.25,-24.02 -232.14,-23.04 -231.97,-22.07 -231.72,-21.12 -231.41,-20.18 -231.04,-19.28 -230.6,-18.4 -230.1,-17.55 -229.54,-16.74 -228.92,-15.98 -228.25,-15.26 -227.53,-14.59 -226.76,-13.97 -225.95,-13.41 -225.11,-12.91 -224.23,-12.47 -223.32,-12.09 -222.39,-11.78 -221.43,-11.53 -220.46,-11.36 -219.49,-11.26 -218.5,-11.22 -155.51,-11.22 -154.53,-11.26 -153.55,-11.36 -152.58,-11.53 -151.63,-11.78 -150.7,-12.09 -149.79,-12.47 -148.91,-12.91 -148.06,-13.41 -147.25,-13.97 -146.49,-14.59 -145.77,-15.26 -145.1,-15.98 -144.48,-16.74 -143.92,-17.55 -143.42,-18.4 -142.98,-19.28 -142.6,-20.18 -142.29,-21.12 -142.05,-22.07 -141.87,-23.04 -141.77,-24.02 -141.73,-25 -141.77,-25.98 -141.87,-26.96 -142.05,-27.93 -142.29,-28.88 -142.6,-29.82 -142.98,-30.72 -143.42,-31.6 -143.92,-32.45 -144.48,-33.26 -145.1,-34.02 -145.77,-34.74 -146.49,-35.41 -147.25,-36.03 -148.06,-36.59 -148.91,-37.09 -149.79,-37.53 -150.7,-37.91 -151.63,-38.22 -152.58,-38.46 -153.55,-38.64 -154.53,-38.74 -155.51,-38.78
  Top Layer region: -218.5,11.22 -219.49,11.26 -220.46,11.36 -221.43,11.54 -222.39,11.78 -223.32,12.09 -224.23,12.47 -225.11,12.91 -225.95,13.41 -226.76,13.97 -227.53,14.59 -228.25,15.26 -228.92,15.98 -229.54,16.74 -230.1,17.55 -230.6,18.4 -231.04,19.28 -231.41,20.18 -231.72,21.12 -231.97,22.07 -232.14,23.04 -232.25,24.02 -232.28,25 -232.25,25.98 -232.14,26.96 -231.97,27.93 -231.72,28.88 -231.41,29.82 -231.04,30.72 -230.6,31.6 -230.1,32.45 -229.54,33.26 -228.92,34.02 -228.25,34.74 -227.53,35.41 -226.76,36.03 -225.95,36.59 -225.11,37.09 -224.23,37.53 -223.32,37.91 -222.39,38.22 -221.43,38.47 -220.46,38.64 -219.49,38.74 -218.5,38.78 -155.51,38.78 -154.53,38.74 -153.55,38.64 -152.58,38.47 -151.63,38.22 -150.7,37.91 -149.79,37.53 -148.91,37.09 -148.06,36.59 -147.25,36.03 -146.49,35.41 -145.77,34.74 -145.1,34.02 -144.48,33.26 -143.92,32.45 -143.42,31.6 -142.98,30.72 -142.6,29.82 -142.29,28.88 -142.05,27.93 -141.87,26.96 -141.77,25.98 -141.73,25 -141.77,24.02 -141.87,23.04 -142.05,22.07 -142.29,21.12 -142.6,20.18 -142.98,19.28 -143.42,18.4 -143.92,17.55 -144.48,16.74 -145.1,15.98 -145.77,15.26 -146.49,14.59 -147.25,13.97 -148.06,13.41 -148.91,12.91 -149.79,12.47 -150.7,12.09 -151.63,11.78 -152.58,11.54 -153.55,11.36 -154.53,11.26 -155.51,11.22
  Top Layer region: -218.5,61.22 -219.49,61.26 -220.46,61.36 -221.43,61.54 -222.39,61.78 -223.32,62.09 -224.23,62.47 -225.11,62.91 -225.95,63.41 -226.76,63.97 -227.53,64.59 -228.25,65.26 -228.92,65.98 -229.54,66.74 -230.1,67.55 -230.6,68.4 -231.04,69.28 -231.41,70.18 -231.72,71.12 -231.97,72.07 -232.14,73.04 -232.25,74.02 -232.28,75 -232.25,75.98 -232.14,76.96 -231.97,77.93 -231.72,78.88 -231.41,79.82 -231.04,80.72 -230.6,81.6 -230.1,82.45 -229.54,83.26 -228.92,84.02 -228.25,84.74 -227.53,85.41 -226.76,86.03 -225.95,86.59 -225.11,87.09 -224.23,87.53 -223.32,87.91 -222.39,88.22 -221.43,88.47 -220.46,88.64 -219.49,88.74 -218.5,88.78 -155.51,88.78 -154.53,88.74 -153.55,88.64 -152.58,88.47 -151.63,88.22 -150.7,87.91 -149.79,87.53 -148.91,87.09 -148.06,86.59 -147.25,86.03 -146.49,85.41 -145.77,84.74 -145.1,84.02 -144.48,83.26 -143.92,82.45 -143.42,81.6 -142.98,80.72 -142.6,79.82 -142.29,78.88 -142.05,77.93 -141.87,76.96 -141.77,75.98 -141.73,75 -141.77,74.02 -141.87,73.04 -142.05,72.07 -142.29,71.12 -142.6,70.18 -142.98,69.28 -143.42,68.4 -143.92,67.55 -144.48,66.74 -145.1,65.98 -145.77,65.26 -146.49,64.59 -147.25,63.97 -148.06,63.41 -148.91,62.91 -149.79,62.47 -150.7,62.09 -151.63,61.78 -152.58,61.54 -153.55,61.36 -154.53,61.26 -155.51,61.22
  Top Layer region: -218.5,111.22 -219.49,111.26 -220.46,111.36 -221.43,111.54 -222.39,111.78 -223.32,112.09 -224.23,112.47 -225.11,112.91 -225.95,113.41 -226.76,113.97 -227.53,114.59 -228.25,115.26 -228.92,115.98 -229.54,116.74 -230.1,117.55 -230.6,118.4 -231.04,119.28 -231.41,120.18 -231.72,121.12 -231.97,122.07 -232.14,123.04 -232.25,124.02 -232.28,125 -232.25,125.98 -232.14,126.96 -231.97,127.93 -231.72,128.88 -231.41,129.82 -231.04,130.72 -230.6,131.6 -230.1,132.45 -229.54,133.26 -228.92,134.02 -228.25,134.74 -227.53,135.41 -226.76,136.03 -225.95,136.59 -225.11,137.09 -224.23,137.53 -223.32,137.91 -222.39,138.22 -221.43,138.47 -220.46,138.64 -219.49,138.74 -218.5,138.78 -155.51,138.78 -154.53,138.74 -153.55,138.64 -152.58,138.47 -151.63,138.22 -150.7,137.91 -149.79,137.53 -148.91,137.09 -148.06,136.59 -147.25,136.03 -146.49,135.41 -145.77,134.74 -145.1,134.02 -144.48,133.26 -143.92,132.45 -143.42,131.6 -142.98,130.72 -142.6,129.82 -142.29,128.88 -142.05,127.93 -141.87,126.96 -141.77,125.98 -141.73,125 -141.77,124.02 -141.87,123.04 -142.05,122.07 -142.29,121.12 -142.6,120.18 -142.98,119.28 -143.42,118.4 -143.92,117.55 -144.48,116.74 -145.1,115.98 -145.77,115.26 -146.49,114.59 -147.25,113.97 -148.06,113.41 -148.91,112.91 -149.79,112.47 -150.7,112.09 -151.63,111.78 -152.58,111.54 -153.55,111.36 -154.53,111.26 -155.51,111.22
  Top Layer region: -218.5,161.22 -219.49,161.26 -220.46,161.36 -221.43,161.54 -222.39,161.78 -223.32,162.09 -224.23,162.47 -225.11,162.91 -225.95,163.41 -226.76,163.97 -227.53,164.59 -228.25,165.26 -228.92,165.98 -229.54,166.74 -230.1,167.55 -230.6,168.4 -231.04,169.28 -231.41,170.18 -231.72,171.12 -231.97,172.07 -232.14,173.04 -232.25,174.02 -232.28,175 -232.25,175.98 -232.14,176.96 -231.97,177.93 -231.72,178.88 -231.41,179.82 -231.04,180.72 -230.6,181.6 -230.1,182.45 -229.54,183.26 -228.92,184.02 -228.25,184.74 -227.53,185.41 -226.76,186.03 -225.95,186.59 -225.11,187.09 -224.23,187.53 -223.32,187.91 -222.39,188.22 -221.43,188.47 -220.46,188.64 -219.49,188.74 -218.5,188.78 -155.51,188.78 -154.53,188.74 -153.55,188.64 -152.58,188.47 -151.63,188.22 -150.7,187.91 -149.79,187.53 -148.91,187.09 -148.06,186.59 -147.25,186.03 -146.49,185.41 -145.77,184.74 -145.1,184.02 -144.48,183.26 -143.92,182.45 -143.42,181.6 -142.98,180.72 -142.6,179.82 -142.29,178.88 -142.05,177.93 -141.87,176.96 -141.77,175.98 -141.73,175 -141.77,174.02 -141.87,173.04 -142.05,172.07 -142.29,171.12 -142.6,170.18 -142.98,169.28 -143.42,168.4 -143.92,167.55 -144.48,166.74 -145.1,165.98 -145.77,165.26 -146.49,164.59 -147.25,163.97 -148.06,163.41 -148.91,162.91 -149.79,162.47 -150.7,162.09 -151.63,161.78 -152.58,161.54 -153.55,161.36 -154.53,161.26 -155.51,161.22
  Top Layer region: -218.5,211.22 -219.49,211.26 -220.46,211.36 -221.43,211.54 -222.39,211.78 -223.32,212.09 -224.23,212.47 -225.11,212.91 -225.95,213.41 -226.76,213.97 -227.53,214.59 -228.25,215.26 -228.92,215.98 -229.54,216.74 -230.1,217.55 -230.6,218.4 -231.04,219.28 -231.41,220.18 -231.72,221.12 -231.97,222.07 -232.14,223.04 -232.25,224.02 -232.28,225 -232.25,225.98 -232.14,226.96 -231.97,227.93 -231.72,228.88 -231.41,229.82 -231.04,230.72 -230.6,231.6 -230.1,232.45 -229.54,233.26 -228.92,234.02 -228.25,234.74 -227.53,235.41 -226.76,236.03 -225.95,236.59 -225.11,237.09 -224.23,237.53 -223.32,237.91 -222.39,238.22 -221.43,238.47 -220.46,238.64 -219.49,238.74 -218.5,238.78 -155.51,238.78 -154.53,238.74 -153.55,238.64 -152.58,238.47 -151.63,238.22 -150.7,237.91 -149.79,237.53 -148.91,237.09 -148.06,236.59 -147.25,236.03 -146.49,235.41 -145.77,234.74 -145.1,234.02 -144.48,233.26 -143.92,232.45 -143.42,231.6 -142.98,230.72 -142.6,229.82 -142.29,228.88 -142.05,227.93 -141.87,226.96 -141.77,225.98 -141.73,225 -141.77,224.02 -141.87,223.04 -142.05,222.07 -142.29,221.12 -142.6,220.18 -142.98,219.28 -143.42,218.4 -143.92,217.55 -144.48,216.74 -145.1,215.98 -145.77,215.26 -146.49,214.59 -147.25,213.97 -148.06,213.41 -148.91,212.91 -149.79,212.47 -150.7,212.09 -151.63,211.78 -152.58,211.54 -153.55,211.36 -154.53,211.26 -155.51,211.22
  silkscreen extent -126,-265 192,256